# EAGLE board SISTEM MINIMUM ATMEGA16 trace LCD ADC (EAGLE 5.06)
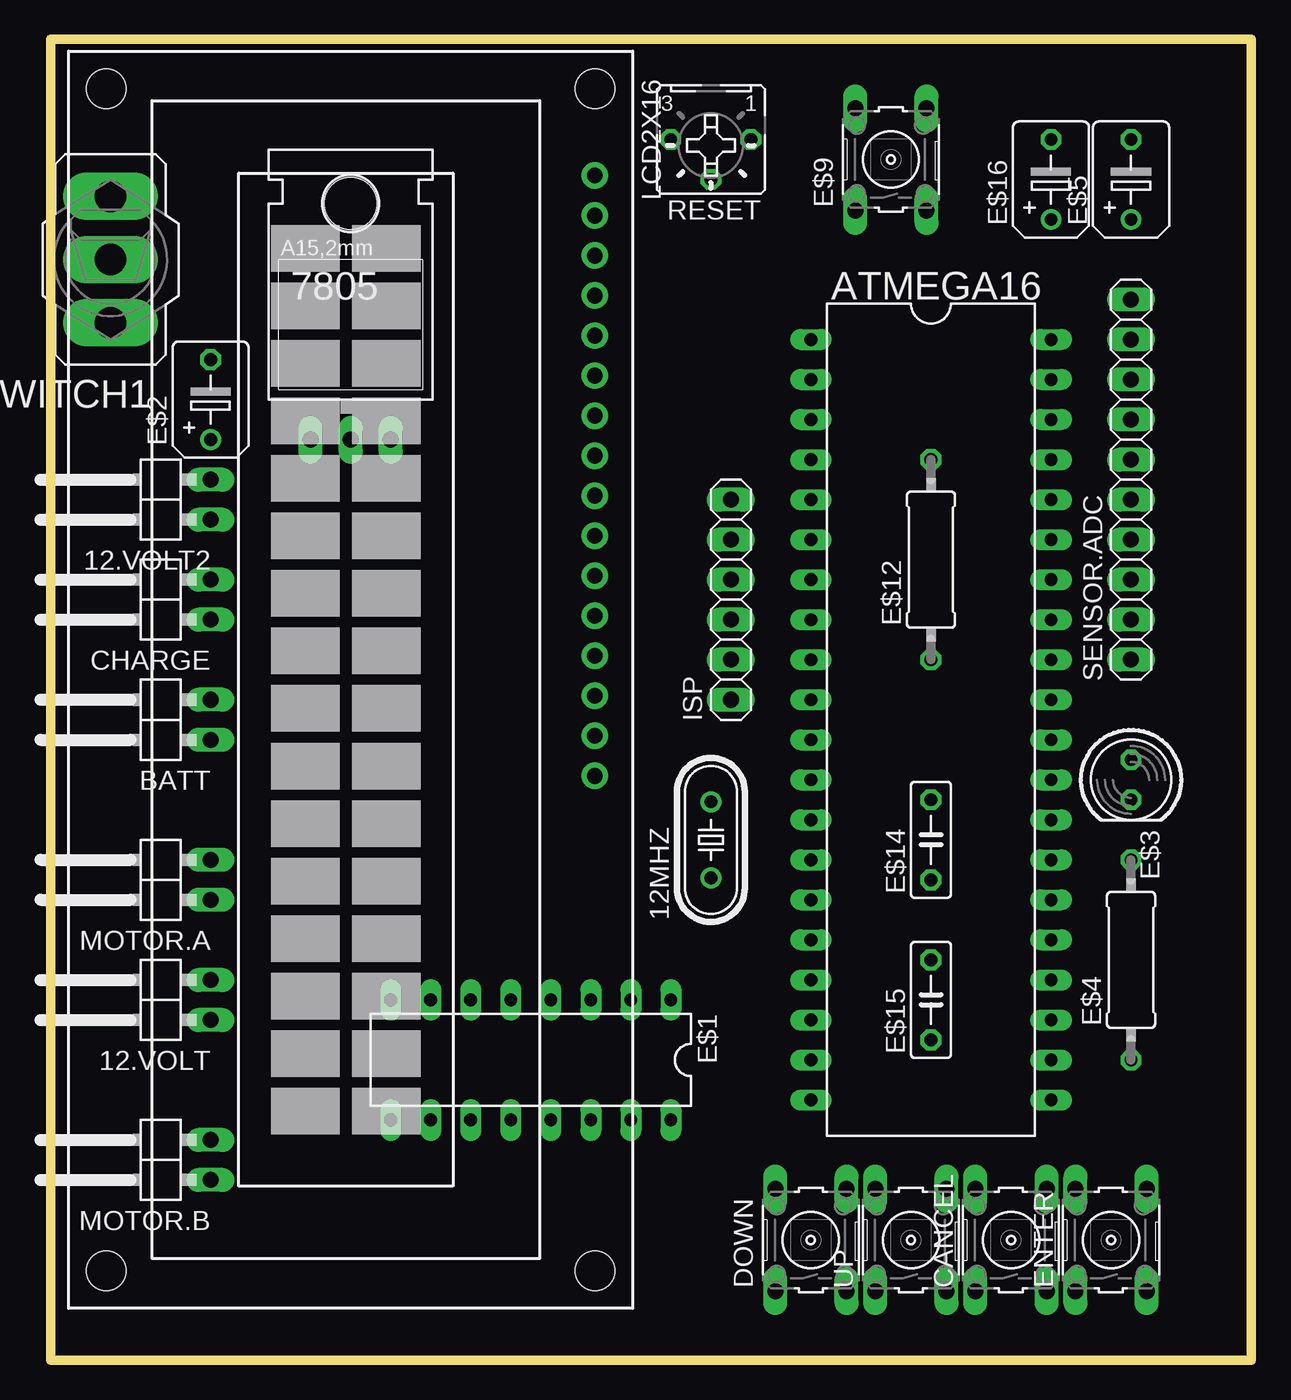
[diagram p0: board, top side]
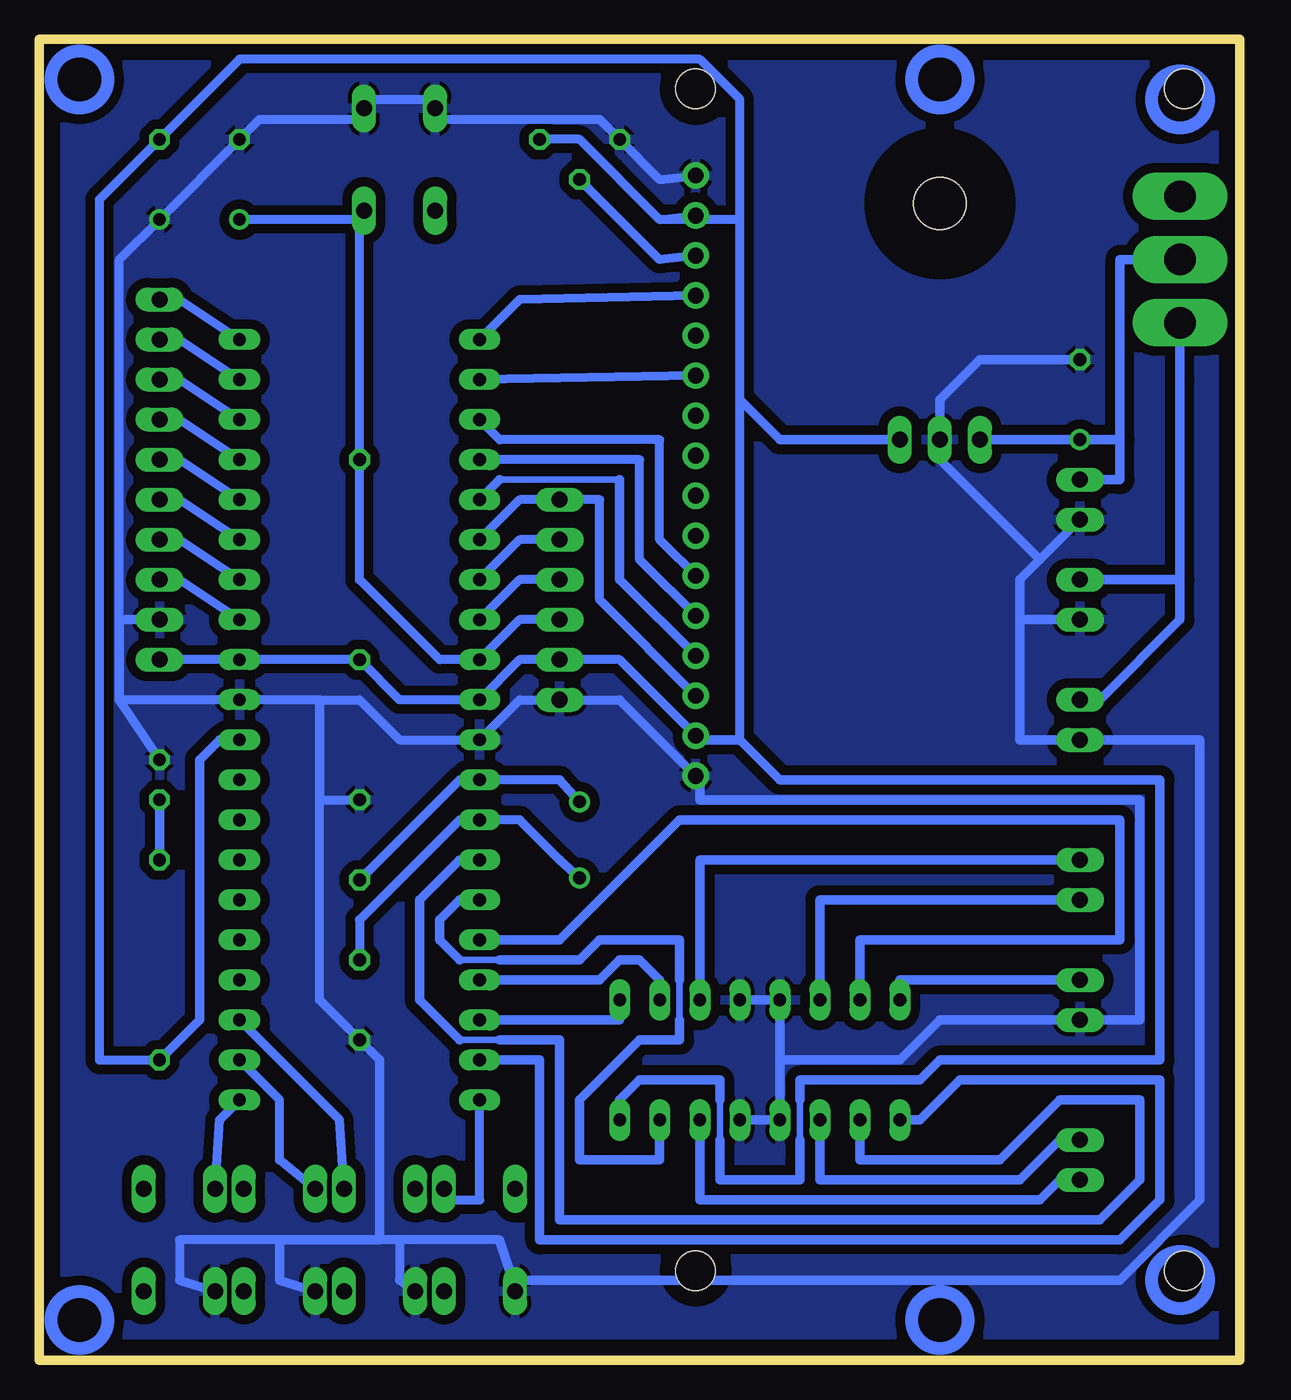
[diagram p1: board, bottom side, seen from below]

Size 76.2 x 83.82 mm. Coordinates in mm from the lower left corner, seen from the top.
Outline: 0,83.82 76.2,83.82 76.2,0 0,0 0,83.82
Copper layers (1*16): Top 0.035mm / dielectric 1.5mm / Bottom 0.035mm
Design rules "default *": minimum track width 22mil, minimum drill 24mil, track to track 12mil, track to pad 12mil, pad to pad 12mil, via to via 12mil, smd to smd 8mil, copper to edge 40mil, drill to drill 8mil, minimum pad ring 10mil, minimum via ring 8mil, stop-mask expansion 4mil, vias tented up to drill 0mil, thermal gap 10mil

## Footprints (pad centres in the part's own frame; a part is rotated, then mirrored left to right if it is on the bottom)
1X02/90 = drill 1.016 long: 1 -1.27,-3.81; 2 1.27,-3.81
HC49/S = drill 0.813 round: 1 -2.413,0; 2 2.413,0
78XXL = drill 1.016 long: GND 0,-3.81; IN -2.54,-3.81; OUT 2.54,-3.81 | hole 3.302: 0,11.176
DIL40 = drill 0.813 long: 1 -24.13,-7.62; 2 -21.59,-7.62; 3 -19.05,-7.62; 4 -16.51,-7.62; 5 -13.97,-7.62; 6 -11.43,-7.62; 7 -8.89,-7.62; 8 -6.35,-7.62; 9 -3.81,-7.62; 10 -1.27,-7.62; 11 1.27,-7.62; 12 3.81,-7.62; 13 6.35,-7.62; 14 8.89,-7.62; 15 11.43,-7.62; 16 13.97,-7.62; 17 16.51,-7.62; 18 19.05,-7.62; 19 21.59,-7.62; 20 24.13,-7.62; 21 24.13,7.62; 22 21.59,7.62; 23 19.05,7.62; 24 16.51,7.62; 25 13.97,7.62; 26 11.43,7.62; 27 8.89,7.62; 28 6.35,7.62; 29 3.81,7.62; 30 1.27,7.62; 31 -1.27,7.62; 32 -3.81,7.62; 33 -6.35,7.62; 34 -8.89,7.62; 35 -11.43,7.62; 36 -13.97,7.62; 37 -16.51,7.62; 38 -19.05,7.62; 39 -21.59,7.62; 40 -24.13,7.62
B3F-10XX = drill 1.016 long: 1 -3.251,2.261; 2 3.251,2.261; 3 -3.251,-2.261; 4 3.251,-2.261
DIL16 = drill 0.813 long: 1 -8.89,-3.81; 2 -6.35,-3.81; 3 -3.81,-3.81; 4 -1.27,-3.81; 5 1.27,-3.81; 6 3.81,-3.81; 7 6.35,-3.81; 8 8.89,-3.81; 9 8.89,3.81; 10 6.35,3.81; 11 3.81,3.81; 12 1.27,3.81; 13 -1.27,3.81; 14 -3.81,3.81; 15 -6.35,3.81; 16 -8.89,3.81
B45181B = drill 0.813 round: + -2.54,0 | drill 0.813 octagon: - 2.54,0
LED5MM = drill 0.813 octagon: A -1.27,0; K 1.27,0
0309/12 = drill 0.813 octagon: 1 -6.35,0; 2 6.35,0
C050-025X075 = drill 0.813 octagon: 1 -2.54,0; 2 2.54,0
1X06 = drill 1.016 long: 1 -6.35,0; 2 -3.81,0; 3 -1.27,0; 4 1.27,0; 5 3.81,0; 6 6.35,0
TUXGR_16X2_R2 = drill 1 pad 1.676 round: 1 -32,15.5; 2 -29.46,15.5; 3 -26.92,15.5; 4 -24.38,15.5; 5 -21.84,15.5; 6 -19.3,15.5; 7 -16.76,15.5; 8 -14.22,15.5; 9 -11.68,15.5; 10 -9.14,15.5; 11 -6.6,15.5; 12 -4.06,15.5; 13 -1.52,15.5; 14 1.02,15.5; 15 3.56,15.5; 16 6.1,15.5 | hole 2.5: -37.5,-15.5; 37.5,-15.5; -37.5,15.5; 37.5,15.5
B25P = drill 0.813 octagon: A -2.54,0; E 2.54,0; S 0,2.54
1X10 = drill 1.016 long: 1 -11.43,0; 2 -8.89,0; 3 -6.35,0; 4 -3.81,0; 5 -1.27,0; 6 1.27,0; 7 3.81,0; 8 6.35,0; 9 8.89,0; 10 11.43,0
320-916 = drill 2.007 long: 1 0,4.013; 2 0,0; 3 0,-4.013

## Placement (x,y rotation side)
12.VOLT  [1X02/90]  6.35,22.86 90 top
12.VOLT2  [1X02/90]  6.35,54.61 90 top
12MHZ  [HC49/S]  41.91,33.02 90 top
7805  [78XXL]  19.05,62.23 0 top
ATMEGA16  [DIL40]  55.88,40.64 270 top
BATT  [1X02/90]  6.35,40.64 90 top
CANCEL  [B3F-10XX]  60.96,7.62 90 top
CHARGE  [1X02/90]  6.35,48.26 90 top
DOWN  [B3F-10XX]  48.26,7.62 90 top
E$1  [DIL16]  30.48,19.05 180 top
E$2  [B45181B]  10.16,60.96 90 top
E$3  [LED5MM]  68.58,36.83 270 top
E$4  [0309/12]  68.58,25.4 90 top
E$5  [B45181B]  68.58,74.93 90 top
E$9  [B3F-10XX]  53.34,76.2 90 top
E$12  [0309/12]  55.88,50.8 90 top
E$14  [C050-025X075]  55.88,33.02 90 top
E$15  [C050-025X075]  55.88,22.86 90 top
E$16  [B45181B]  63.5,74.93 90 top
ENTER  [B3F-10XX]  67.31,7.62 90 top
ISP  [1X06]  43.18,48.26 90 top
LCD2X16  [TUXGR_16X2_R2]  19.05,43.18 270 top
MOTOR.A  [1X02/90]  6.35,30.48 90 top
MOTOR.B  [1X02/90]  6.35,12.7 90 top
RESET  [B25P]  41.91,77.47 180 top
SENSOR.ADC  [1X10]  68.58,55.88 90 top
SWITCH1  [320-916]  3.81,69.85 180 top
UP  [B3F-10XX]  54.61,7.62 90 top

## Library data of the parts
12.VOLT 12.VOLT2 BATT CHARGE ISP MOTOR.A MOTOR.B SENSOR.ADC = pinhead
12MHZ = crystal
7805 = v-reg
ATMEGA16 = atmel
CANCEL DOWN E$9 ENTER UP = switch-omron
E$1 = ic-package
E$2 E$4 E$5 E$12 E$14-E$16 = resistor
E$3 = led
LCD2X16 = display-lcd
RESET = pot
SWITCH1 = switch

## Nets
S$1: ATMEGA16.18 E$1.1
S$2: ATMEGA16.6 ISP.6 LCD2X16.14
S$3: ATMEGA16.7 ISP.5
S$4: ATMEGA16.8 ISP.4
S$5: 12.VOLT2.1 12.VOLT.1 7805.GND ATMEGA16.11 ATMEGA16.31 CANCEL.1 CHARGE.1 DOWN.1 E$1.4 E$1.5 E$1.12 E$1.13 E$2.- E$3.A E$5.+ E$9.2 E$9.4 E$14.2 E$15.1 E$16.- ENTER.1 ISP.1 LCD2X16.1 LCD2X16.16 RESET.E SENSOR.ADC.2 UP.1
S$6: 7805.OUT ATMEGA16.10 ATMEGA16.30 ATMEGA16.32 E$1.16 E$4.1 E$5.- E$12.1 ISP.2 LCD2X16.2 LCD2X16.15 RESET.A SENSOR.ADC.1
S$7: LCD2X16.3 RESET.S
S$8: ATMEGA16.1 LCD2X16.4
S$9: ATMEGA16.2 LCD2X16.6
S$10: ATMEGA16.3 LCD2X16.11
S$11: ATMEGA16.4 LCD2X16.12
S$13: 12MHZ.2 ATMEGA16.12 E$14.1
S$14: 12MHZ.1 ATMEGA16.13 E$15.2
S$15: ATMEGA16.5 LCD2X16.13
S$16: ATMEGA16.33 SENSOR.ADC.3
S$17: ATMEGA16.34 SENSOR.ADC.4
S$18: ATMEGA16.35 SENSOR.ADC.5
S$19: ATMEGA16.36 SENSOR.ADC.6
S$20: ATMEGA16.37 SENSOR.ADC.7
S$21: ATMEGA16.38 SENSOR.ADC.8
S$22: ATMEGA16.39 SENSOR.ADC.9
S$23: ATMEGA16.40 SENSOR.ADC.10
S$24: ATMEGA16.9 E$9.3 E$12.2 E$16.+ ISP.3
S$25: ATMEGA16.19 E$1.9
S$26: 12.VOLT.2 E$1.8
S$27: E$3.K E$4.2
S$29: ATMEGA16.20 DOWN.4
S$30: ATMEGA16.21 ENTER.2
S$31: ATMEGA16.22 CANCEL.2
S$32: ATMEGA16.23 UP.4
S$34: 12.VOLT2.2 7805.IN E$2.+ SWITCH1.2
S$35: ATMEGA16.17 E$1.2
S$36: ATMEGA16.16 E$1.7
S$37: E$1.6 MOTOR.A.1
S$38: E$1.3 MOTOR.A.2
S$39: E$1.11 MOTOR.B.2
S$40: E$1.14 MOTOR.B.1
S$42: BATT.2 CHARGE.2
S$46: ATMEGA16.15 E$1.15
S$47: ATMEGA16.14 E$1.10

## Tracks (layer width: path | path; a pad name or v marks a point on that pad's centre or on a via)
S$1
  Bottom 0.61: E$1.1 39.37,21.59 ATMEGA16.18
S$2
  Bottom 0.559: ATMEGA16.6 45.72,54.61 ISP.6 40.64,54.61 40.64,48.26 LCD2X16.14
S$3
  Bottom 0.559: ATMEGA16.7 45.72,52.07 ISP.5
S$4
  Bottom 0.559: ATMEGA16.8 45.72,49.53 ISP.4
S$5
  Bottom 0.406: E$1.12 E$1.13 | E$1.4 E$1.5 29.21,19.05 | 39.37,41.91 34.29,36.83
  Bottom 0.559: LCD2X16.1 36.83,74.93 RESET.E 40.64,78.74 50.8,78.74 E$9.2 50.8,80.01 55.88,80.01 E$9.4 55.88,78.74 62.23,78.74 E$16.- | E$5.+ 71.12,69.85 71.12,46.99 | LCD2X16.16 39.37,41.91 ISP.1 45.72,41.91 ATMEGA16.11 53.34,39.37 55.88,41.91 58.42,41.91 ATMEGA16.31 71.12,41.91 | ENTER.1 67.31,5.08 67.31,7.62 60.96,7.62 | E$14.2 58.42,35.56 58.42,22.86 E$15.1 | 60.96,5.08 CANCEL.1 | UP.1 53.34,5.08 53.34,7.62 | 53.34,7.62 54.61,7.62 | 53.34,7.62 46.99,7.62 45.72,3.81 DOWN.1
  Bottom 0.61: E$1.12 E$1.13 | E$1.12 E$1.5 E$1.4 | E$1.12 29.21,19.05 21.59,19.05 19.05,21.59 12.VOLT.1 6.35,21.59 6.35,35.56 34.29,35.56 34.29,36.83 | E$2.- 16.51,63.5 19.05,60.96 7805.GND 19.05,57.15 12.7,50.8 | 58.42,35.56 58.42,41.91 | 60.96,5.08 60.96,7.62 54.61,7.62 54.61,19.05 E$15.1 | 12.7,50.8 12.VOLT2.1 | 12.7,50.8 13.97,49.53 13.97,46.99 | 13.97,46.99 CHARGE.1 | 45.72,3.81 45.72,5.08 7.62,5.08 2.54,10.16 2.54,39.37 13.97,39.37 13.97,46.99 | E$3.A 71.12,41.91 71.12,46.99 SENSOR.ADC.2 | E$5.+ E$16.-
  pour Bottom (isolate 0.61): 0,83.82 76.2,83.82 76.2,0 0,0
S$6
  Bottom 0.406: 39.37,16.51 E$1.16 | 33.02,12.7 33.02,13.97 33.02,16.51 | 27.94,16.51 27.94,13.97 27.94,12.7
  Bottom 0.559: 64.77,39.37 ATMEGA16.30 | SENSOR.ADC.1 ATMEGA16.32 E$12.1 53.34,41.91 ATMEGA16.10 45.72,44.45 ISP.2 39.37,44.45 34.29,39.37 LCD2X16.15 | E$4.1 72.39,19.05 72.39,73.66 E$5.- | 63.5,82.55 34.29,82.55 31.75,80.01 31.75,72.39 | RESET.A 41.91,77.47 36.83,72.39 | 36.83,72.39 LCD2X16.2 | 31.75,72.39 36.83,72.39 | 31.75,72.39 31.75,60.96 31.75,39.37
  Bottom 0.61: 64.77,39.37 66.04,38.1 66.04,21.59 E$4.1 | 39.37,16.51 38.1,17.78 33.02,17.78 33.02,16.51 | 33.02,11.43 33.02,12.7 | 27.94,11.43 33.02,11.43 | 7805.OUT 29.21,58.42 31.75,60.96 | 27.94,12.7 27.94,11.43 | 34.29,39.37 31.75,39.37 29.21,36.83 5.08,36.83 5.08,19.05 19.05,19.05 20.32,17.78 27.94,17.78 27.94,16.51 | 63.5,82.55 E$5.- | 33.02,11.43 33.02,13.97 | 27.94,13.97 27.94,11.43
S$7
  Bottom 0.559: RESET.S 36.83,69.85 LCD2X16.3
S$8
  Bottom 0.559: ATMEGA16.1 45.72,67.31 LCD2X16.4
S$9
  Bottom 0.559: LCD2X16.6 ATMEGA16.2
S$10
  Bottom 0.559: ATMEGA16.3 46.99,58.42 36.83,58.42 36.83,52.07 34.29,49.53 LCD2X16.11
S$11
  Bottom 0.559: ATMEGA16.4 38.1,57.15 38.1,50.8 34.29,46.99 LCD2X16.12
S$13
  Bottom 0.559: 12MHZ.2 43.18,36.83 ATMEGA16.12 49.53,36.83 E$14.1
S$14
  Bottom 0.559: 12MHZ.1 43.18,31.75 45.72,34.29 ATMEGA16.13 49.53,34.29 55.88,27.94 E$15.2
S$15
  Bottom 0.406: 39.37,55.88 46.99,55.88
  Bottom 0.559: LCD2X16.13 34.29,44.45
  Bottom 0.61: 46.99,55.88 ATMEGA16.5 | 39.37,55.88 39.37,49.53 34.29,44.45
S$16
  Bottom 0.559: ATMEGA16.33 67.31,49.53 SENSOR.ADC.3
S$17
  Bottom 0.559: ATMEGA16.34 67.31,52.07 SENSOR.ADC.4
S$18
  Bottom 0.559: ATMEGA16.35 67.31,54.61 SENSOR.ADC.5
S$19
  Bottom 0.559: ATMEGA16.36 67.31,57.15 SENSOR.ADC.6
S$20
  Bottom 0.559: ATMEGA16.37 67.31,59.69 SENSOR.ADC.7
S$21
  Bottom 0.559: ATMEGA16.38 67.31,62.23 SENSOR.ADC.8
S$22
  Bottom 0.559: ATMEGA16.39 67.31,64.77 SENSOR.ADC.9
S$23
  Bottom 0.559: ATMEGA16.40 67.31,67.31 SENSOR.ADC.10
S$24
  Bottom 0.559: ISP.3 45.72,46.99 ATMEGA16.9 50.8,44.45 55.88,49.53 E$12.2 55.88,72.39 | 55.88,72.39 E$16.+ | 55.88,72.39 E$9.3
S$25
  Bottom 0.61: ATMEGA16.19 44.45,19.05 44.45,7.62 7.62,7.62 5.08,10.16 5.08,17.78 17.78,17.78 20.32,15.24 E$1.9
S$26
  Bottom 0.61: E$1.8 21.59,24.13 12.VOLT.2
S$27
  Bottom 0.61: E$4.2 E$3.K
S$29
  Bottom 0.559: ATMEGA16.20 48.26,10.16 50.8,10.16 DOWN.4
S$30
  Bottom 0.559: ATMEGA16.21 64.77,15.24 ENTER.2
S$31
  Bottom 0.559: ATMEGA16.22 60.96,16.51 60.96,12.7 CANCEL.2
S$32
  Bottom 0.559: ATMEGA16.23 57.15,15.24 UP.4
S$34
  Bottom 0.61: SWITCH1.2 7.62,69.85 7.62,58.42 | 7.62,58.42 7.62,55.88 12.VOLT2.2 | 7.62,58.42 E$2.+ 7805.IN
S$35
  Bottom 0.406: 46.99,24.13 ATMEGA16.17
  Bottom 0.61: 46.99,24.13 40.64,24.13 39.37,25.4 38.1,25.4 36.83,24.13 E$1.2
S$36
  Bottom 0.61: ATMEGA16.16 43.18,26.67 35.56,34.29 7.62,34.29 7.62,26.67 24.13,26.67 E$1.7
S$37
  Bottom 0.61: MOTOR.A.1 26.67,29.21 E$1.6
S$38
  Bottom 0.61: E$1.3 34.29,31.75 MOTOR.A.2
S$39
  Bottom 0.61: E$1.11 26.67,11.43 13.97,11.43 11.43,13.97 MOTOR.B.2
S$40
  Bottom 0.61: MOTOR.B.1 11.43,11.43 12.7,10.16 34.29,10.16 E$1.14
S$42
  Bottom 0.61: BATT.2 8.89,41.91 3.81,46.99 3.81,49.53 | 3.81,49.53 3.81,62.23 | 3.81,49.53 3.81,66.04 | 3.81,49.53 CHARGE.2
S$46
  Bottom 0.406: 49.53,29.21 ATMEGA16.15 | 45.72,25.4 46.99,25.4 49.53,25.4 | 35.56,21.59 35.56,24.13 35.56,25.4
  Bottom 0.61: E$1.15 36.83,12.7 41.91,12.7 41.91,16.51 38.1,20.32 35.56,20.32 35.56,21.59 | 35.56,25.4 35.56,26.67 | 35.56,26.67 40.64,26.67 41.91,25.4 44.45,25.4 | 44.45,25.4 45.72,25.4 | 49.53,25.4 50.8,26.67 50.8,27.94 49.53,29.21 | 35.56,24.13 35.56,26.67 | 44.45,25.4 46.99,25.4
S$47
  Bottom 0.406: 45.72,20.32 46.99,20.32 49.53,20.32
  Bottom 0.61: 43.18,20.32 45.72,20.32 | 43.18,20.32 43.18,8.89 8.89,8.89 6.35,11.43 6.35,16.51 11.43,16.51 15.24,12.7 24.13,12.7 E$1.10 | ATMEGA16.14 49.53,31.75 52.07,29.21 52.07,22.86 49.53,20.32 | 43.18,20.32 46.99,20.32
(copper drawn outside any net)
  shapes: Bottom circle x6